# Altium PCB parsa_mostari_frahani.PcbDoc
Units mm, origin at the board's own origin, x right, y up, seen from the top; angles counter-clockwise.
Board outline 94.87 x 64.13 mm, 2 copper layers (Top Layer, Bottom Layer); 28 components, 23 nets, 114 pads, 15 vias.
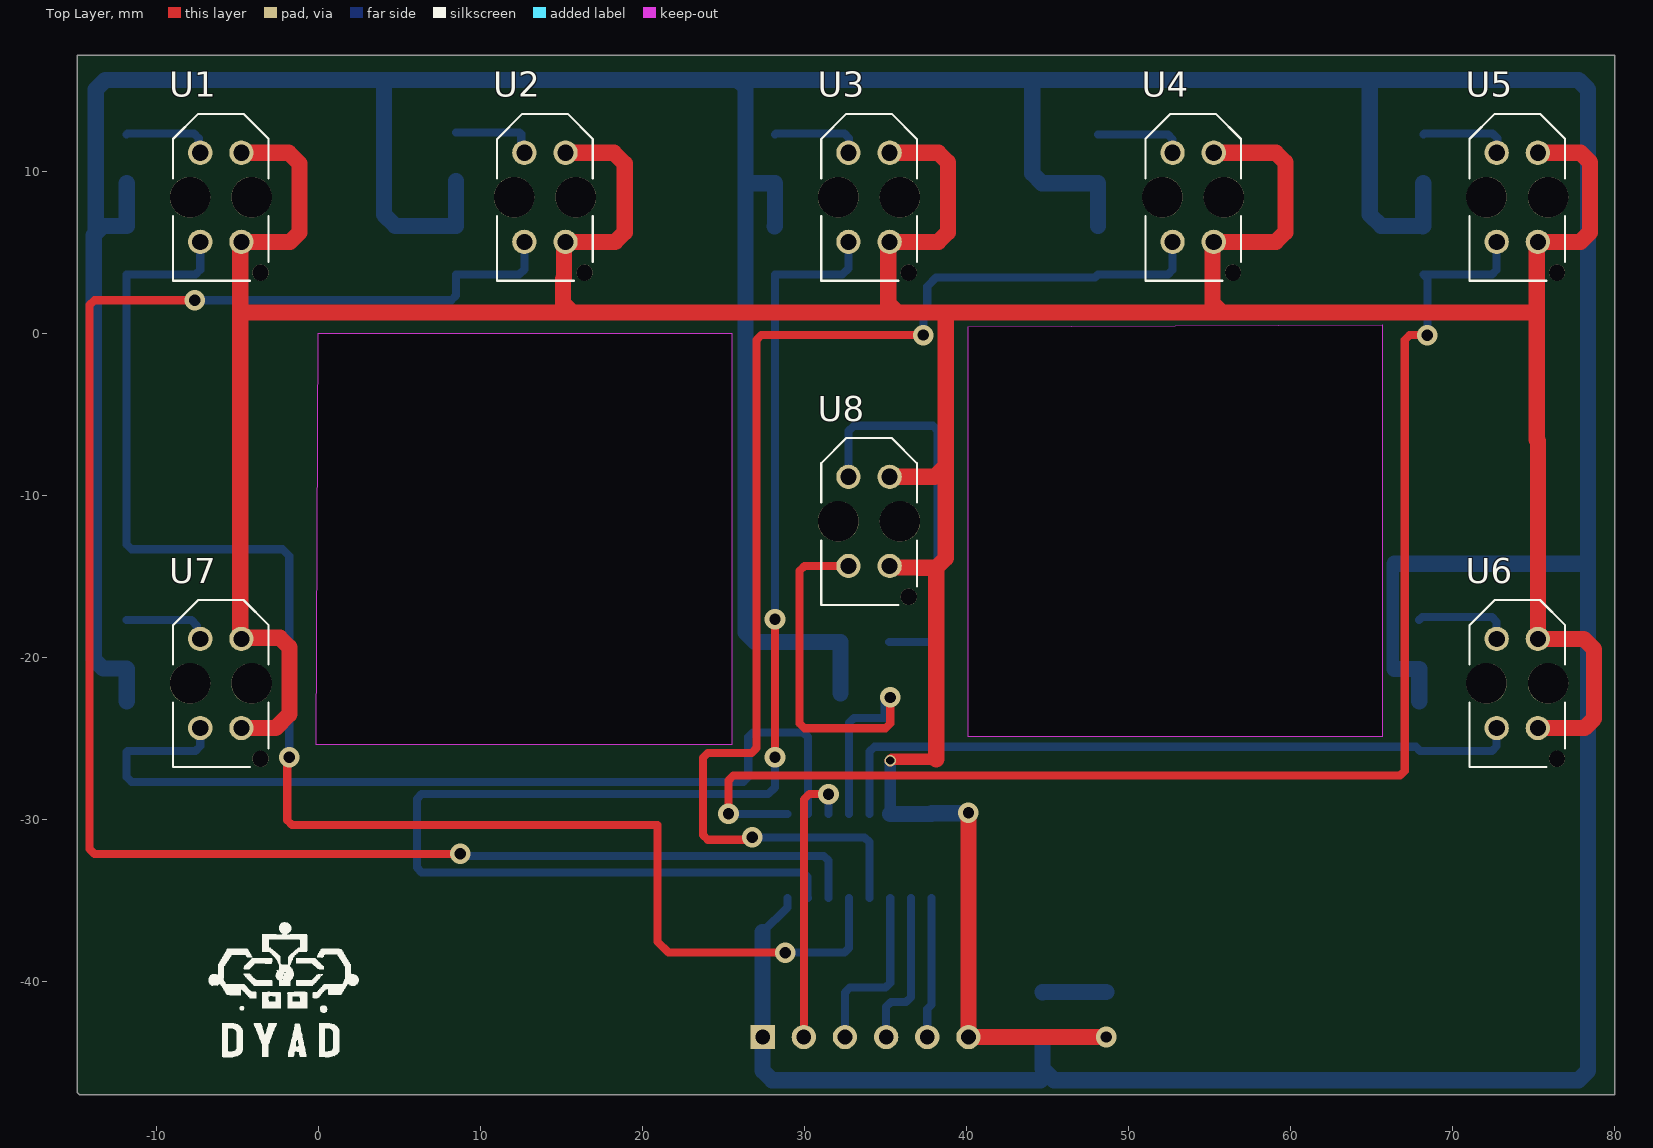
[diagram p0: Top Layer view]
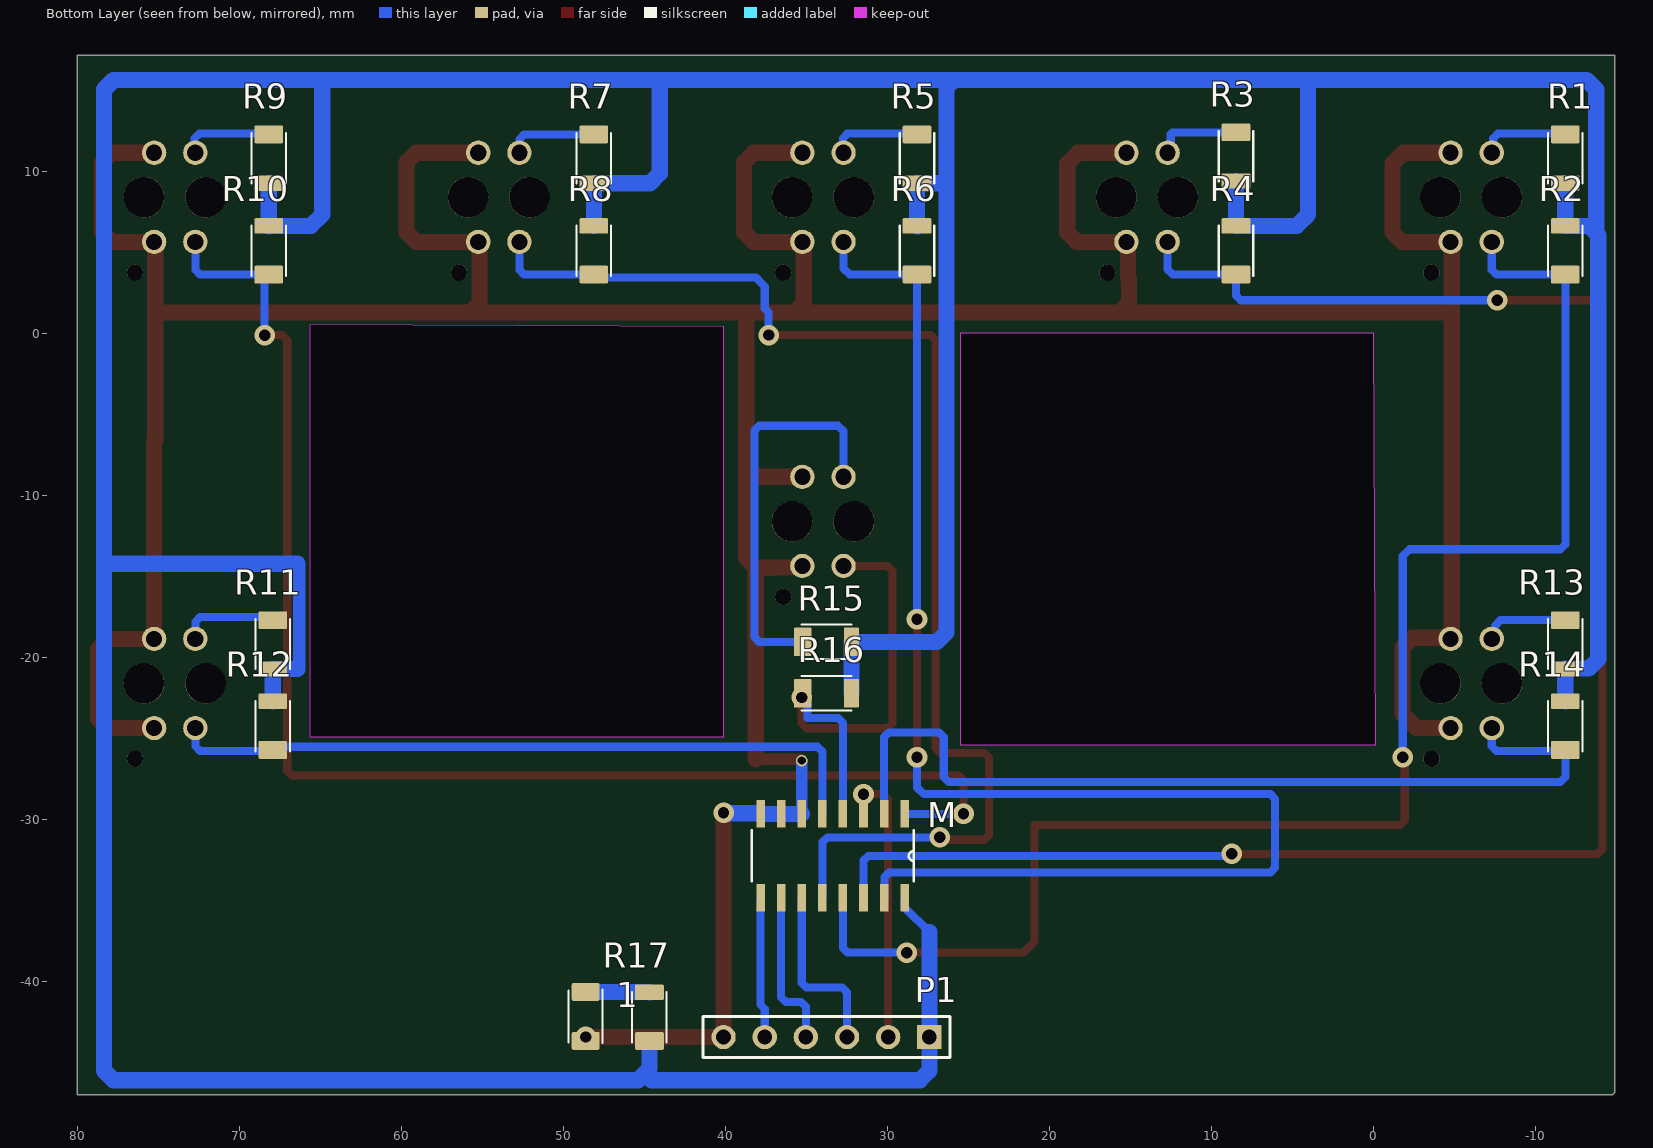
[diagram p1: Bottom Layer view, seen from below]
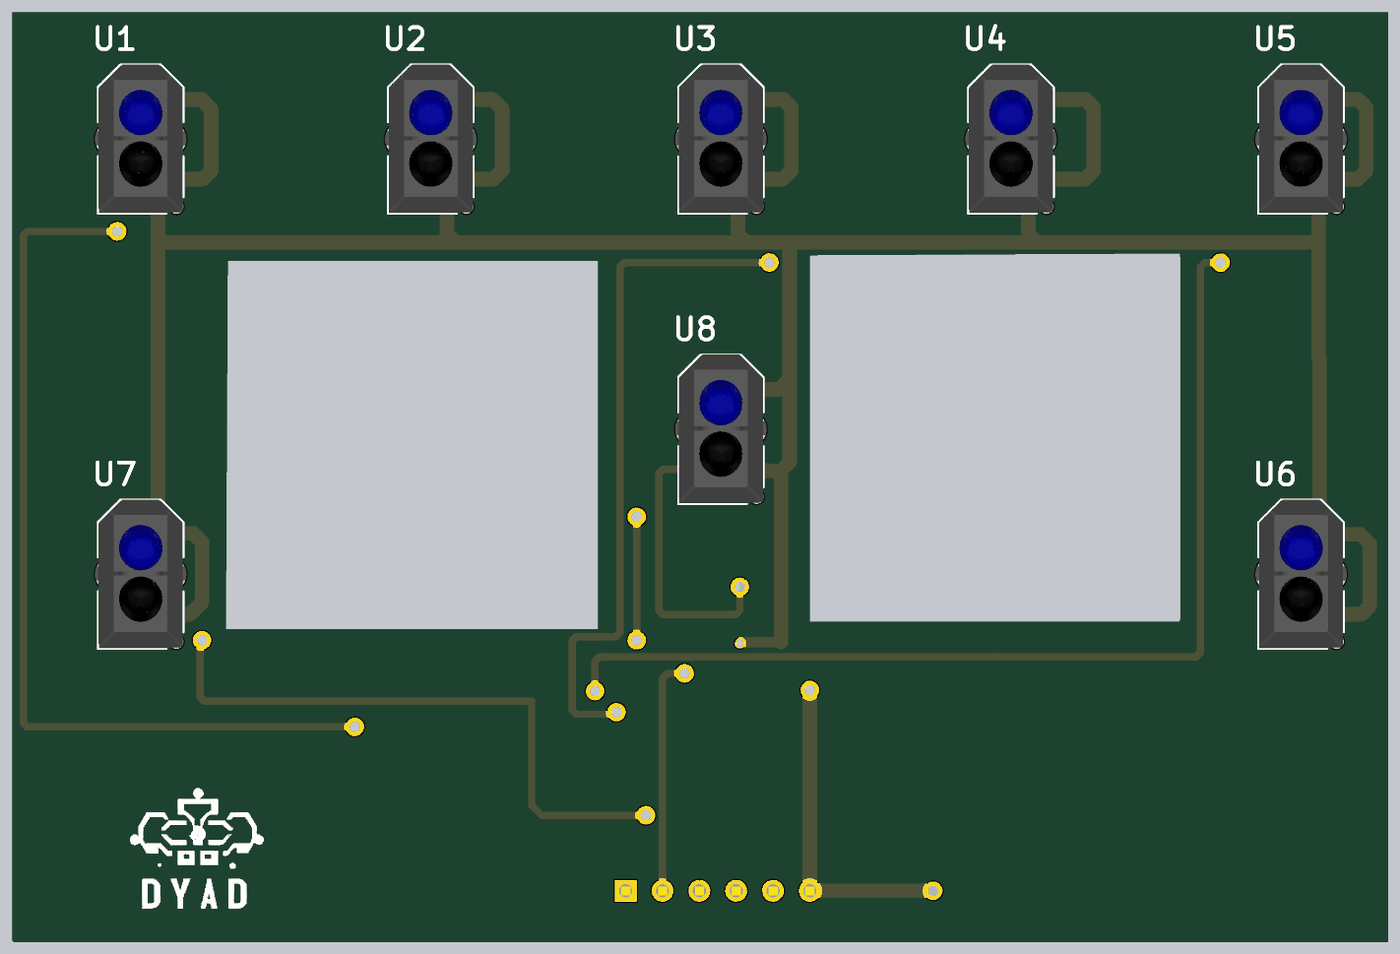
[diagram p2: 3D render of the assembled board from above, using the file's embedded part models]
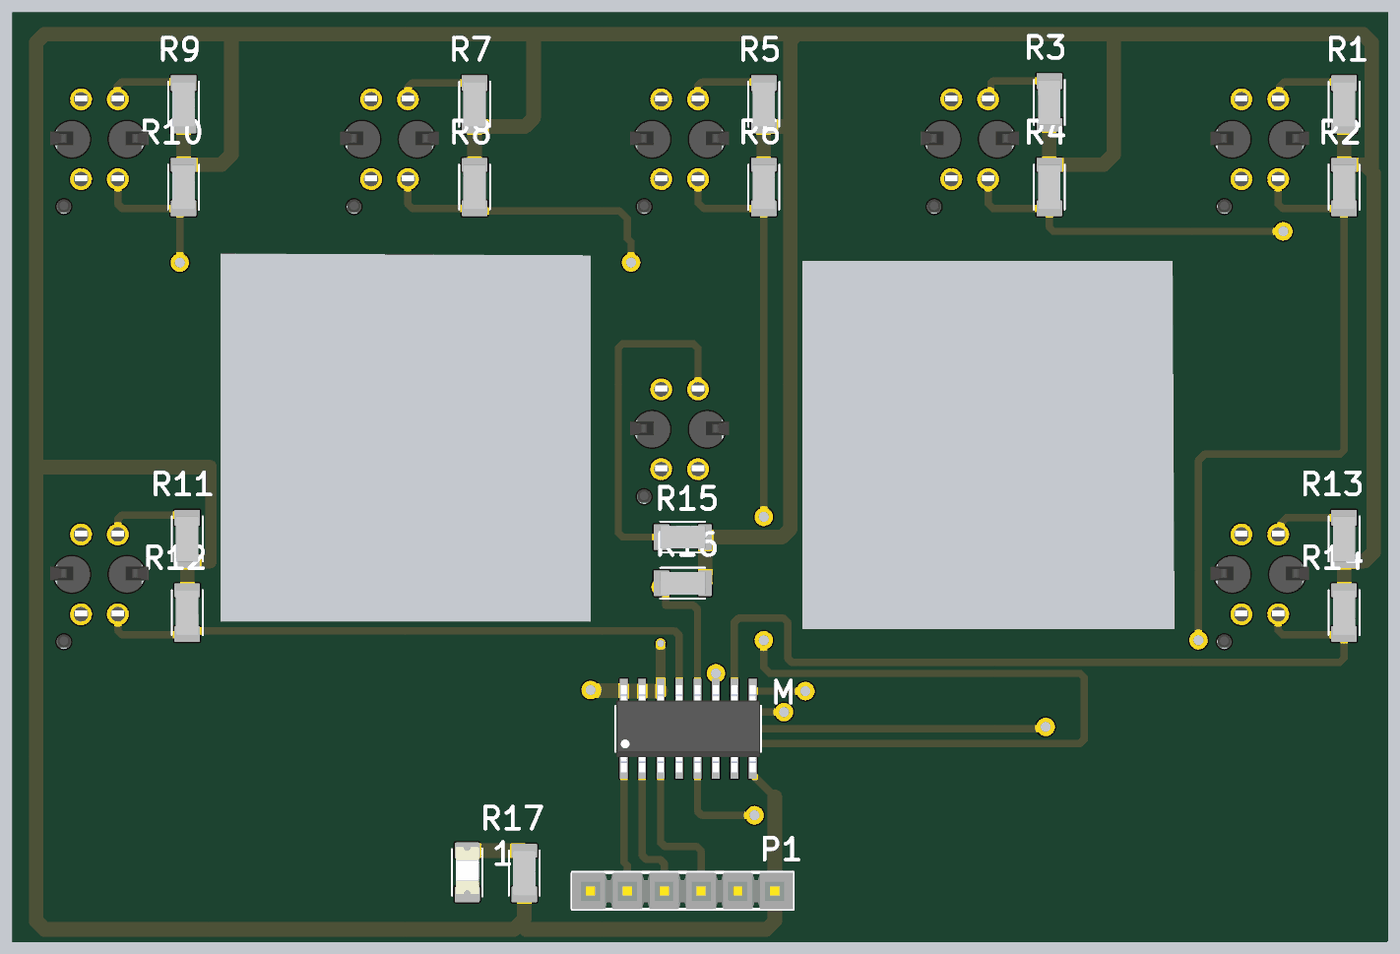
[diagram p3: 3D render of the assembled board from below, using the file's embedded part models]

## Layer stack, top to bottom
Top Solder: solder mask 0.0102, Solder Resist, Dk 3.5
Top Layer: signal copper 0.0356
Dielectric 1: dielectric 0.32, FR-4, Dk 4.8
Bottom Layer: signal copper 0.0356
Bottom Solder: solder mask 0.0102, Solder Resist, Dk 3.5

## Board outline
-14.732,-46.99 -14.859,-46.863 -14.859,17.145 80.01,17.145 80.01,-46.99
cut-out: 65.659,0.508 65.659,-24.892 40.132,-24.892 40.132,0.381
cut-out: 0,0 25.527,0 25.527,-25.4 -0.127,-25.4

## Design rules (kind name [scope] priority, off if disabled: settings)
Clearance [All] p1: gap=0.254 ignorepadtopadclearanceinfootprint=FALSE except(0: Arc-Hole Track-Hole SMDPad-Hole THPad-Hole Via-Hole Fill-Hole Poly-Hole Region-Hole Text-Hole)
PolygonConnect [All] p1: connectstyle=Relief reliefconductorwidth=0.254 reliefentries=4 polygonreliefangle="90 Angle" airgapwidth=0.254
RoutingVias [All] p1: holewidth=0.711 width=1.27 viastyle="Through Hole" minholewidth=0.711 minwidth=1.27 maxholewidth=0.711 maxwidth=1.27
SolderMaskExpansion [All] p1: expansion=0.102 istentingtop=FALSE
Width [All] p1: maxlimit=2 minlimit=0.5 preferedwidth=1 minimp=50.000000 maximp=50.000000 favimp=50.000000
30 further rules are at their usual default settings.

## Components (designator, comment, footprint, x,y, rotation, side; value= is the part's Value field where it differs from the comment)
1 "LTST-C230KFKT" LEDC3216X110 48.641,-42.164 r90 bottom
M "74HC4051D" SOIC127P600X175-16N 33.401,-32.258 r270 bottom
P1 "Header 6" HDR1X6 27.432,-43.434 r0 bottom
R1 "220" RESC3115X65N -11.811,10.795 r270 bottom
R2 "2K" RESC3115X65N -11.811,5.08 r90 bottom
R3 "220" RESC3115X65N 8.509,10.922 r270 bottom
R4 "2K" RESC3115X65N 8.509,5.08 r90 bottom
R5 "220" RESC3115X65N 28.194,10.795 r270 bottom
R6 "2K" RESC3115X65N 28.194,5.08 r90 bottom
R7 "220" RESC3115X65N 48.133,10.795 r270 bottom
R8 "2K" RESC3115X65N 48.133,5.08 r90 bottom
R9 "220" RESC3115X65N 68.199,10.795 r270 bottom
R10 "2K" RESC3115X65N 68.199,5.08 r90 bottom
R11 "220" RESC3115X65N 67.945,-19.177 r270 bottom
R12 "2K" RESC3115X65N 67.945,-24.257 r90 bottom
R13 "220" RESC3115X65N -11.811,-19.177 r270 bottom
R14 "2K" RESC3115X65N -11.811,-24.257 r90 bottom
R15 "220" RESC3115X65N 33.782,-19.05 r180 bottom
R16 "2K" RESC3115X65N 33.782,-22.225 r180 bottom
R17 "1879462-3" RESC3115X65N 44.704,-42.214 r90 bottom
U1 "IR_SENSOR" OPTO_TCRT5000 -6.002,8.382 r90 top
U2 "IR_SENSOR" OPTO_TCRT5000 13.998,8.382 r90 top
U3 "IR_SENSOR" OPTO_TCRT5000 33.998,8.382 r90 top
U4 "IR_SENSOR" OPTO_TCRT5000 53.998,8.382 r90 top
U5 "IR_SENSOR" OPTO_TCRT5000 73.998,8.382 r90 top
U6 "IR_SENSOR" OPTO_TCRT5000 73.998,-21.618 r90 top
U7 "IR_SENSOR" OPTO_TCRT5000 -6.002,-21.618 r90 top
U8 "IR_SENSOR" OPTO_TCRT5000 33.998,-11.618 r90 top

## Footprints (in the part's own frame and the unit in brackets; to place one, negate y for a bottom-side part, rotate by r counter-clockwise, add the part's x,y. Pads: shape width x height; smd on the part's side, far side on the other; paste and mask are expansions set on the pad)
HDR1X6 [mm] "Connector; Header; 6 Position"
  rect 1.5x1.5 hole 0.9: 1(0,0)
  round 1.5 hole 0.9: 2(2.54,0) 3(5.08,0) 4(7.62,0) 5(10.16,0) 6(12.7,0)
  silkscreen extent -1.27,-1.27 13.97,1.27, body extent -1.26,-1.25 13.98,1.29, height 8.38
LEDC3216X110 [mm]
  rrect20% 1.1x1.73 smd: A(1.51,0) C(-1.51,0)
  silkscreen extent -1.65,-1.04 1.65,1.04, body extent -1.47,-0.8 1.73,0.8, height 1.13
OPTO_TCRT5000 [mm]
  round 1.5 hole 1: A(2.75,1.27) CATH(2.75,-1.27) COLL(-2.75,1.27) E(-2.75,-1.27)
  round 1 hole 1 unplated: ""(-4.65,-2.45)
  round 2.5 hole 2.5 unplated: ""(0,1.9) ""(0,-1.9)
  silkscreen extent -5.15,-2.95 5.15,2.95, body extent -5.04,-3.4 5.16,3.4, height 7.2
RESC3115X65N [mm]
  rrect14% 1.09x1.77 smd: 1(-1.465,0)
  rrect14% 0.94x1.77 smd: 2(1.54,0)
  silkscreen extent -1.55,-1.06 1.55,1.06, body extent -1.55,-0.77 1.55,0.77, height 0.53
SOIC127P600X175-16N [mil]
  rect 67x21 smd: 1(-102,175) 2(-102,125) 3(-102,75) 4(-102,25) 5(-102,-25) 6(-102,-75) 7(-102,-125) 8(-102,-175) 9(102,-175) 10(102,-125) 11(102,-75) 12(102,-25) 13(102,25) 14(102,75) 15(102,125) 16(102,175)
  silkscreen extent -62,-197 62,197, body extent -118,-195 118,195, height 67

## Part data
1: "Orange 605nm LED Indication - Discrete 2V 1206 (3216 Metric)", Package="1206 Lite-On", Availability=Unavailable, MF="Lite-On Inc.", MP=LTST-C230KFKT, Price=None, SnapEDA_Link=https://www.snapeda.com/parts/LTST-C230KFKT/Lite-On%20Inc./view-part/353318/?ref=snap
M: "1 Circuit IC Switch 8:1 130Ohm 16-SOIC", Package="SOIC-16 Toshiba", Availability="In Stock", Check_prices=https://www.snapeda.com/parts/74HC4051D/Toshiba/view-part/?ref=eda, MF=Toshiba, MP=74HC4051D, Price=None, Purchase-URL=https://pricing.snapeda.com/search/part/74HC4051D/?ref=eda, SnapEDA_Link=https://www.snapeda.com/parts/74HC4051D/Toshiba/view-part/?ref=snap
P1: "Header, 6-Pin", LatestRevisionDate=17-Jul-2002, LatestRevisionNote="Re-released for DXP Platform.", Publisher="Altium Limited"
R1 R2 R3 R4 R5 R6 R7 R8 R9 R10 R11 R12 R13 R14 R15 R16: library part 1879462-3, "RL73H 2B R12 1% 5K RL", Package=None, Availability=Unavailable, MP=1879462-3, Price=None
R17: "RL73H 2B R12 1% 5K RL", Package=None, Availability=Unavailable, MP=1879462-3, Price=None
U1 U2 U3 U4 U5 U6 U7 U8: library part TCRT5000, "950 nm 60 mA Through Hole Reflective Optical Sensor with Transistor Output", Package=None, Availability=Unavailable, MP=TCRT5000, Price=None

## Via types
v1: diameter 1.27, hole 0.7, Top Layer to Bottom Layer, 14 vias
v2: diameter 0.7, hole 0.5, Top Layer to Bottom Layer, 1 vias

## Nets (pads, with @x,y where several pads share a name; then routed paths per layer and width w, separated by ;. In a path a pad name is that pad's centre, name@x,y a point inside that pad or via, vN(x,y) a via of type N, cw(c..) or ccw(c..) an arc to the next point about the centre after c; other vN are vias at no path point)
+5: M.16 P1.1 R1.2 R2.2 R3.2 R4.2 R5.2 R6.2 R7.2 R8.2 R9.2 R10.2 R11.2 R12.2 R13.2 R14.2 R15.2 R16.2 R17.1 | length 375.8
  Bottom Layer w0.5: 27.432,-36.957 28.956,-35.433 M.16
  Bottom Layer w0.8: 66.413,-20.717 66.406,-20.717 66.313,-20.624 66.313,-14.324 66.413,-14.224
  Bottom Layer w1: R14.2 R13.2 -11.827,-20.701 -13.257,-20.701 -13.843,-20.115 -13.843,6.034 -13.716,6.161 ; R1.2 R2.2 -13.257,6.62 -13.716,6.161 ; R3.2 R4.2 4.761,6.62 4.064,7.317 4.064,15.621 ; 27.432,-36.957 P1.1 27.432,-45.515 28.018,-46.101 44.577,-46.101 44.997,-45.681 ; R6.2@28.164,6.59 R6.2 R5.2 26.367,9.255 ; R16.2 R15.2 26.953,-19.05 26.367,-18.464 26.367,9.255 ; R17.1 44.704,-45.388 45.417,-46.101 77.773,-46.101 78.359,-45.515 78.359,-14.351 ; R8.2 R7.2 44.671,9.255 44.069,9.857 44.069,15.621 ; 66.413,-20.717 R11.2 R12.2 ; 66.413,-14.224 78.232,-14.224 78.359,-14.351 ; R9.2 R10.2 68.169,6.59 68.139,6.62 65.594,6.62 64.897,7.317 64.897,15.621 ; -13.716,6.161 -13.716,15.035 -13.13,15.621 4.064,15.621 ; 4.064,15.621 25.908,15.621 ; 25.908,15.621 44.069,15.621 ; 25.908,15.621 26.367,15.162 26.367,9.255 ; 44.069,15.621 64.897,15.621 ; 64.897,15.621 77.773,15.621 78.359,15.035 78.359,-14.351
A1: M.3 P1.2 | length 17.5
  Top Layer w0.5: P1.2 29.972,-28.783 30.311,-28.444 v1(31.496,-28.444)
  Bottom Layer w0.5: M.3 v1(31.496,-28.444)
D1: M.11 P1.3 | length 11
  Bottom Layer w0.5: P1.3 32.512,-40.679 32.805,-40.386 35.013,-40.386 35.306,-40.093 M.11
D2: M.10 P1.4 | length 9.8
  Bottom Layer w0.5: P1.4 35.052,-41.568 35.345,-41.275 36.283,-41.275 36.576,-40.982 M.10
D3: M.9 P1.5 | length 8.7
  Bottom Layer w0.5: P1.5 37.592,-41.695 37.846,-41.441 M.9
GND: 1.C M.6 M.7 M.8 P1.6 U1.CATH U1.E U2.CATH U2.E U3.CATH U3.E U4.CATH U4.E U5.CATH U5.E U6.CATH U6.E U7.CATH U7.E U8.CATH U8.E | length 294.5
  Top Layer w0.5: U8.E U8.E@35.285,-14.351
  Top Layer w0.7: v2(35.306,-26.377) 35.394,-26.289 38.149,-26.289
  Top Layer w1: U7.E -2.618,-24.368 -1.77,-23.52 -1.77,-19.382 -2.356,-18.796 -4.66,-18.796 U7.CATH -4.806,-18.794 -4.806,1.27 ; U1.CATH -1.812,11.132 -1.143,10.463 -1.143,6.218 -1.729,5.632 U1.E -4.806,5.558 -4.806,1.27 ; U2.CATH 18.254,11.132 18.923,10.463 18.923,6.218 18.337,5.632 U2.E 15.172,5.536 15.172,3.401 15.113,3.342 15.113,1.856 15.699,1.27 ; U8.E 35.364,-14.464 37.135,-14.464 37.149,-14.478 38.149,-14.478 ; U8.CATH 38.044,-8.868 38.735,-8.177 ; U3.CATH 38.276,11.132 38.862,10.546 38.862,6.218 38.276,5.632 U3.E 35.179,5.543 35.179,1.856 35.765,1.27 ; 38.149,-26.289 38.149,-14.478 ; v1(40.132,-29.591) P1.6 v1(48.641,-43.434) ; U4.CATH 59.104,11.132 59.69,10.546 59.69,6.218 59.104,5.632 U4.E 55.194,5.558 55.194,1.856 55.78,1.27 ; U6.E 78.154,-24.368 78.74,-23.782 78.74,-19.509 78.099,-18.868 U6.CATH 75.268,-6.655 75.194,-6.581 75.194,1.27 ; U5.CATH 77.9,11.132 78.486,10.546 78.486,6.218 77.9,5.632 U5.E 75.194,5.558 75.194,1.27 ; -4.806,1.27 15.699,1.27 ; 15.699,1.27 35.765,1.27 ; 35.765,1.27 38.735,1.27 ; 38.149,-14.478 38.735,-13.892 38.735,-8.177 ; 38.735,-8.177 38.735,1.27 ; 38.735,1.27 55.78,1.27 ; 55.78,1.27 75.194,1.27
  Bottom Layer w0.7: M.6 v2(35.306,-26.377)
  Bottom Layer w1: U1.E@-4.806,5.558 U1.E ; U2.CATH U2.CATH@15.364,11.228 ; M.6 M.7 M.8 37.884,-29.629 40.094,-29.629 v1(40.132,-29.591)
Net1_A: 1.A R17.2 | length 3.9
  Bottom Layer w1: R17.2 44.714,-40.664 48.631,-40.664 1.A
NetR1_1: R1.1 U1.A | length 5.5
  Bottom Layer w0.5: R1.1 -11.752,12.319 -7.659,12.319 -7.366,12.026 -7.366,11.226 U1.A
NetR3_1: R3.1 U2.A | length 5.3
  Bottom Layer w0.5: R3.1 12.435,12.387 12.537,12.285 12.537,11.323 U2.A
NetR5_1: R5.1 U3.A | length 5.6
  Bottom Layer w0.5: R5.1 28.253,12.319 32.473,12.319 32.766,12.026 32.766,11.17 U3.A
NetR7_1: R7.1 U4.A | length 5.6
  Bottom Layer w0.5: R7.1 52.435,12.26 52.728,11.967 U4.A
NetR9_1: R9.1 U5.A | length 5.6
  Bottom Layer w0.5: R9.1 68.258,12.319 72.478,12.319 72.771,12.026 72.771,11.175 U5.A
NetR11_1: R11.1 U6.A | length 6.1
  Top Layer w0.5: U6.A@72.644,-18.784 U6.A
  Bottom Layer w0.5: R11.1 68.131,-17.526 72.435,-17.526 72.728,-17.819 U6.A
NetR13_1: R13.1 U7.A | length 5.4
  Bottom Layer w0.5: R13.1 -7.823,-17.712 -7.463,-18.072 -7.463,-18.677 U7.A
NetR15_1: R15.1 U8.A | length 24.7
  Bottom Layer w0.5: U8.A@32.919,-9.059 U8.A 32.728,-6.046 33.059,-5.715 37.934,-5.715 38.227,-6.008 38.227,-18.757 37.934,-19.05 R15.1
S1: M.13 R2.1 U1.COLL | length 95.2
  Top Layer w0.5: v1(-1.778,-26.162) -1.905,-26.289 -1.905,-30.06 -1.612,-30.353 20.955,-30.353 20.955,-37.553 21.629,-38.227 v1(28.833,-38.227)
  Bottom Layer w0.5: U1.COLL -7.272,3.908 -7.565,3.615 R2.1 -11.811,-13.042 -11.518,-13.335 -2.198,-13.335 -1.778,-13.755 v1(-1.778,-26.162) ; v1(28.833,-38.227) 32.473,-38.227 32.766,-37.934 M.13
S2: M.14 R4.1 U2.COLL | length 112
  Top Layer w0.5: v1(-7.62,2.032) -13.804,2.032 -14.097,1.739 -14.097,-31.842 -13.804,-32.135 v1(8.763,-32.135)
  Bottom Layer w0.5: v1(-7.62,2.032) 8.216,2.032 8.509,2.325 R4.1 12.407,3.615 12.728,3.936 U2.COLL ; v1(8.763,-32.135) 8.886,-32.258 31.203,-32.258 31.496,-32.551 M.14
S3: M.15 R6.1 U3.COLL | length 90.3
  Top Layer w0.5: v1(28.194,-26.166) v1(28.194,-17.653)
  Bottom Layer w0.5: v1(28.194,-26.166) 28.194,-28.028 27.774,-28.448 6.389,-28.448 6.096,-28.741 6.096,-32.981 6.389,-33.274 29.933,-33.274 30.209,-33.55 30.209,-34.832 M.15 ; v1(28.194,-17.653) R6.1 32.346,3.615 32.728,3.997 U3.COLL
S4: M.12 R8.1 U4.COLL | length 78.3
  Top Layer w0.5: v1(26.797,-31.115) 26.65,-31.262 24.042,-31.262 23.749,-30.969 23.749,-26.201 24.042,-25.908 26.758,-25.908 27.055,-25.611 27.055,-0.412 27.348,-0.119 v1(37.346,-0.119)
  Bottom Layer w0.5: v1(26.797,-31.115) 33.726,-31.115 34.019,-31.408 34.019,-34.832 M.12 ; v1(37.346,-0.119) 37.346,1.27 37.592,1.516 37.592,2.882 38.139,3.429 47.947,3.429 R8.1 52.435,3.615 52.728,3.908 U4.COLL
S5: M.1 R10.1 U5.COLL | length 86
  Top Layer w0.5: v1(25.324,-29.667) 25.324,-27.598 25.617,-27.305 66.763,-27.305 67.056,-27.012 67.056,-0.42 67.349,-0.127 v1(68.453,-0.127)
  Bottom Layer w0.5: v1(25.324,-29.667) M.1 ; v1(68.453,-0.127) 68.453,3.361 R10.1 72.435,3.615 72.728,3.908 U5.COLL
S6: M.5 R12.1 U6.COLL | length 44.3
  Top Layer w0.5: U6.COLL@72.537,-24.559 U6.COLL
  Bottom Layer w0.5: M.5 34.036,-25.816 34.329,-25.523 67.746,-25.523 68.004,-25.781 72.435,-25.781 72.728,-25.488 U6.COLL
S7: M.2 R14.1 U7.COLL | length 57.1
  Bottom Layer w0.5: U7.COLL -7.272,-25.488 -7.565,-25.781 -11.752,-25.781 -11.811,-25.84 -11.811,-27.393 -11.518,-27.686 26.25,-27.686 26.543,-27.393 26.543,-24.931 26.836,-24.638 29.933,-24.638 30.226,-24.931 M.2
S8: M.4 R16.1 U8.COLL | length 29.6
  Top Layer w0.5: U8.COLL 30.011,-14.368 29.718,-14.661 29.718,-24.091 30.011,-24.384 35.013,-24.384 35.306,-24.091 v1(35.306,-22.479)
  Bottom Layer w0.5: M.4 32.766,-24.042 33.059,-23.749 34.954,-23.749 34.954,-22.518 R16.1
pads on no net: U1. U2. U3. U4. U5. U6. U7. U8.

## Silkscreen, mask and mechanical layers (free items; w line width, h text height)
Top Overlay:
  drawing of 17 lines, arcs and shapes, not listed
Mechanical 1:
  lines w0.254: -14.859,-46.863 -14.732,-46.99 80.01,-46.99 80.01,-45.212 80.01,17.145 -14.859,17.145 -14.859,-46.863 ; 0,-25.4 0,0 25.527,0 25.527,-25.273 25.4,-25.4 0,-25.4 ; 40.132,-24.892 65.532,-24.892 65.659,-24.765 65.659,0.508 40.132,0.508 40.132,-24.892